# EAGLE board LandingGearSchematic_5 (EAGLE 9.5.1)
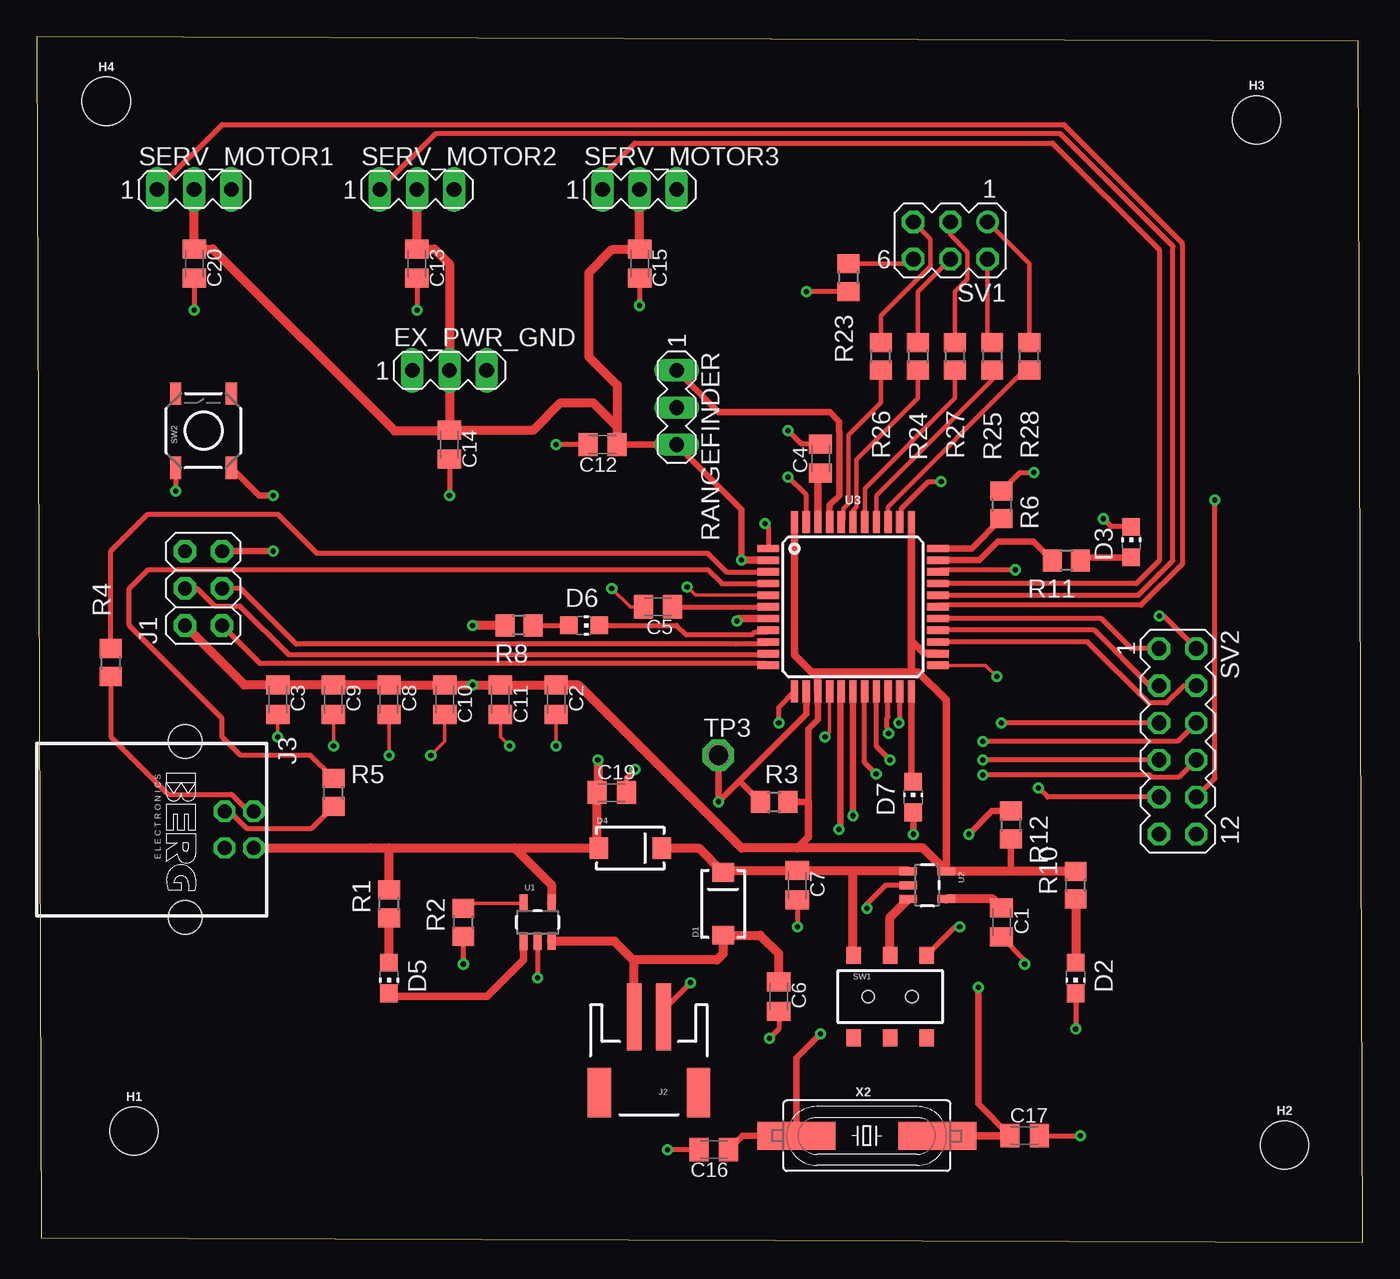
[diagram p0: board, top side]
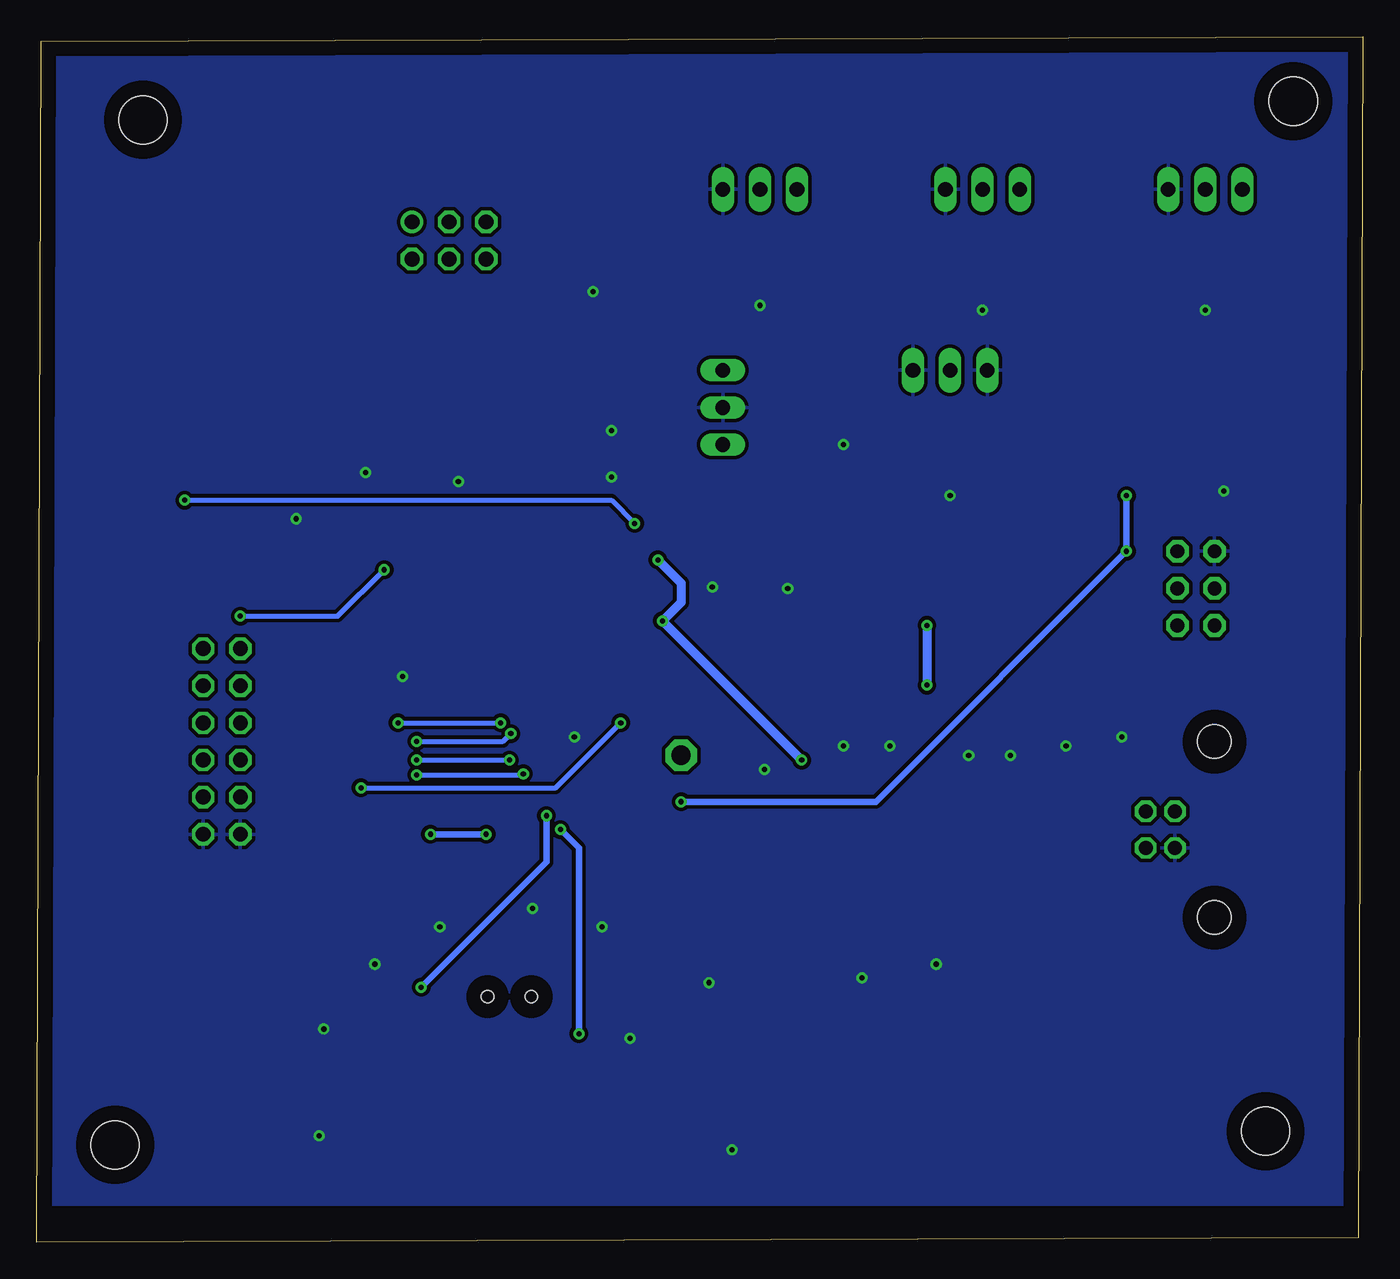
[diagram p1: board, bottom side, seen from below]

Size 90.78 x 82.54 mm. Coordinates in mm from the lower left corner, seen from the top.
Outline: 0.32,0.32 90.78,0 90.47,82.22 0,82.54 0.32,0.32
Copper layers (1*16): Top 0.035mm / dielectric 1.5mm / Bottom 0.035mm
Design rules "default": minimum track width 6mil, minimum drill 0.35mm, track to track 6mil, track to pad 6mil, pad to pad 6mil, via to via 6mil, smd to smd 6mil, copper to edge 40mil, drill to drill 6mil, minimum pad ring 10mil, minimum via ring 8mil, stop-mask expansion 4mil, vias tented up to drill 0mil, thermal gap 10mil
Net classes: 0 default: width 0.254 mm, clearance 0.254 mm; 1 power: width 0.61 mm, drill 0.61 mm, clearance 0.254 mm

## Footprints (pad centres in the part's own frame; a part is rotated, then mirrored left to right if it is on the bottom)
C0805K = smd 1.3 x 1.6: 1 -1,0; 2 1,0
SMA-DIODE = smd 1.27 x 1.47: A -2.15,0; C 2.15,0
CHIP-LED0805 = smd 1.2 x 1.2: A 0,-1.05; C 0,1.05
MA03-1 = drill 1.016 long: 1 -2.54,0; 2 0,0; 3 2.54,0
STAND-OFF = hole 3.302: 0,0
2X03 = drill 0.95 pad 1.55 octagon: 1 -2.54,-1.27; 2 -2.54,1.27; 3 0,-1.27; 4 0,1.27; 5 2.54,-1.27; 6 2.54,1.27
JST-2-SMD = smd 1 x 4.6: 1 -1,-3.7; 2 1,-3.7 | smd 1.6 x 3.4: NC1 -3.4,1.5; NC2 3.4,1.5
PN61729 = drill 0.95 octagon: 1 1.25,4.71; 2 -1.25,4.71; 3 -1.25,2.71; 4 1.25,2.71 | hole 2.3: -6.02,0; 6.02,0
R0805 = smd 1.3 x 1.5: 1 -0.95,0; 2 0.95,0
MA03-2 = drill 1.016: 1 -2.54,-1.27 | drill 1.016 octagon: 2 -2.54,1.27; 3 0,-1.27; 4 0,1.27; 5 2.54,-1.27; 6 2.54,1.27
MA06-2 = drill 1.016 octagon: 1 -6.35,-1.27; 2 -6.35,1.27; 3 -3.81,-1.27; 4 -3.81,1.27; 5 -1.27,-1.27; 6 -1.27,1.27; 7 1.27,-1.27; 8 1.27,1.27; 9 3.81,-1.27; 10 3.81,1.27; 11 6.35,-1.27; 12 6.35,1.27
AYZ0202 = smd 1 x 1.15: 1 -2.5,2.825; 2 0,2.825; 3 2.5,2.825; 4 -2.5,-2.825; 5 0,-2.825; 6 2.5,-2.825 | hole 0.85: 1.5,0; -1.5,0
TACTILE_SWITCH_SMD = smd 1.524 x 0.762: 1 -2.54,1.905; 2 2.54,1.905; 3 -2.54,-1.905; 4 2.54,-1.905
P1-13 = drill 1.321 pad 2.159 octagon: TP 0,0
SOT23-5 = smd 0.55 x 1.2: 1 -0.95,-1.3; 2 0,-1.3; 3 0.95,-1.3; 4 0.95,1.3; 5 -0.95,1.3
TQFP44 = smd 1.5 x 0.5: 1 -5.8,4; 2 -5.8,3.2; 3 -5.8,2.4; 4 -5.8,1.6; 5 -5.8,0.8; 6 -5.8,0; 7 -5.8,-0.8; 8 -5.8,-1.6; 9 -5.8,-2.4; 10 -5.8,-3.2; 11 -5.8,-4; 23 5.8,-4; 24 5.8,-3.2; 25 5.8,-2.4; 26 5.8,-1.6; 27 5.8,-0.8; 28 5.8,0; 29 5.8,0.8; 30 5.8,1.6; 31 5.8,2.4; 32 5.8,3.2; 33 5.8,4 | smd 0.5 x 1.5: 12 -4,-5.8; 13 -3.2,-5.8; 14 -2.4,-5.8; 15 -1.6,-5.8; 16 -0.8,-5.8; 17 0,-5.8; 18 0.8,-5.8; 19 1.6,-5.8; 20 2.4,-5.8; 21 3.2,-5.8; 22 4,-5.8; 34 4,5.8; 35 3.2,5.8; 36 2.4,5.8; 37 1.6,5.8; 38 0.8,5.8; 39 0,5.8; 40 -0.8,5.8; 41 -1.6,5.8; 42 -2.4,5.8; 43 -3.2,5.8; 44 -4,5.8
HC49UP = smd 5.334 x 1.93: 1 -4.826,0; 2 4.826,0

## Placement (x,y rotation side)
C1  470p  [C0805K]  66.04,21.91 270 top
C2  100n  [C0805K]  35.56,37.15 270 top
C3  100n  [C0805K]  16.51,37.15 270 top
C4  100n  [C0805K]  53.66,53.66 90 top
C5  1u  [C0805K]  42.55,43.5 180 top
C6  4.7u  [C0805K]  50.8,16.83 270 top
C7  4.7u  [C0805K]  52.07,24.45 270 top
C8  4.7u  [C0805K]  24.13,37.15 270 top
C9  100n  [C0805K]  20.32,37.15 270 top
C10  100n  [C0805K]  27.94,37.15 270 top
C11  100n  [C0805K]  31.75,37.15 270 top
C12  0.1u  [C0805K]  38.73,54.61 180 top
C13  0.1u  [C0805K]  26.04,66.99 270 top
C14  0.1u  [C0805K]  28.26,54.61 270 top
C15  0.1u  [C0805K]  41.27,66.99 270 top
C16  30p  [C0805K]  46.35,6.35 180 top
C17  30p  [C0805K]  67.63,7.3 0 top
C19  4.7u  [C0805K]  39.37,30.8 0 top
C20  0.1u  [C0805K]  10.79,66.99 270 top
D1  B340A  [SMA-DIODE]  46.99,23.18 90 top
D2  GREEN  [CHIP-LED0805]  71.12,18.1 180 top
D3  GREEN  [CHIP-LED0805]  74.93,47.94 0 top
D4  B340A  [SMA-DIODE]  40.64,26.99 0 top
D5  GREEN  [CHIP-LED0805]  24.13,18.1 180 top
D6  GREEN  [CHIP-LED0805]  37.47,42.23 270 top
D7  GREEN  [CHIP-LED0805]  60.01,30.48 0 top
EX_PWR_GND  [MA03-1]  28.26,59.69 0 top
H1  STAND-OFF  [STAND-OFF]  6.67,7.62 0 top
H2  STAND-OFF  [STAND-OFF]  85.41,6.67 0 top
H3  STAND-OFF  [STAND-OFF]  83.5,76.84 0 top
H4  STAND-OFF  [STAND-OFF]  4.76,78.1 0 top
J1  3x2 M  [2X03]  11.43,44.77 90 top
J2  S2B-PH-SM4-TB(LF)(SN)  [JST-2-SMD]  41.91,11.75 180 top
J3  [PN61729]  10.16,28.26 270 top
R1  1K  [R0805]  24.13,23.18 90 top
R2  10K  [R0805]  29.21,21.91 90 top
R3  10K  [R0805]  50.48,30.16 0 top
R4  22  [R0805]  5.08,39.69 90 top
R5  22  [R0805]  20.32,30.8 90 top
R6  10K  [R0805]  66.04,50.48 270 top
R8  1K  [R0805]  33.02,42.23 180 top
R10  1K  [R0805]  71.12,24.45 90 top
R11  1K  [R0805]  70.48,46.67 180 top
R12  1K  [R0805]  66.67,28.58 270 top
R23  0  [R0805]  55.56,66.04 270 top
R24  0  [R0805]  60.33,60.64 270 top
R25  0  [R0805]  65.41,60.64 270 top
R26  0  [R0805]  57.78,60.64 90 top
R27  0  [R0805]  62.87,60.64 90 top
R28  0  [R0805]  67.94,60.64 90 top
RANGEFINDER  [MA03-1]  43.81,57.15 270 top
SERV_MOTOR1  [MA03-1]  10.79,72.07 0 top
SERV_MOTOR2  [MA03-1]  26.04,72.07 0 top
SERV_MOTOR3  [MA03-1]  41.27,72.07 0 top
SV1  [MA03-2]  62.55,68.58 180 top
SV2  [MA06-2]  78.11,34.29 270 top
SW1  AYZ0202AGRLC  [AYZ0202]  58.42,16.83 0 top
SW2  !RESET  [TACTILE_SWITCH_SMD]  11.43,55.56 90 top
TP3  TPPAD1-13  [P1-13]  46.67,33.34 0 top
U1  MCP73831  [SOT23-5]  34.29,21.91 0 top
U2  MIC5219  [SOT23-5]  60.96,24.45 270 top
U3  ATMEGA32U4-AUR  [TQFP44]  55.88,43.5 0 top
X2  16 MHz  [HC49UP]  56.83,7.3 0 top

## Library data of the parts
C1 = rcl; DESC: CAP CER 470PF 50V X7R 0805; MFR: Samsung; MPN: CL21B471KBANNNC; SPICEPREFIX: C
C2-C4 C9-C11 = rcl; DESC: CAP CER 0.1UF 50V X7R 0805; MFR: Samsung; MPN: CL21B104KBCNNNC; SPICEPREFIX: C
C5 C12-C15 C20 = rcl; DESC: CAP CER 1UF 16V X7R 0805; MFR: Samsung; MPN: CL21B105KOFNNNG; SPICEPREFIX: C
C6-C8 C19 = rcl; DESC: CAP CER 4.7UF 16V X5R 0805; MFR: Samsung; MPN: CL21A475KOFNNNE; SPICEPREFIX: C
C16 = rcl; DESC: CAP CER 30PF 50V C0G/NP0 0805; MFR: Samsung; MPN: CL21C300JBANNNC; SPICEPREFIX: C
C17 = rcl; DESC: CAP CER 30PF 50V C0G/NP0 0805; MFR: Samsung; MPN: CL21C180JBANNNC; SPICEPREFIX: C
D1 D4 = SparkFun-DiscreteSemi; DESC: DIODE SCHOTTKY 40V 2A SMA; MFR: Diodes Inc; MPN: B340AE-13
D2 D3 D5-D7 = led; DESC: LED GREEN CLEAR 0805 SMD; MFR: Würth Elektronik; MPN: 150080GS75000
EX_PWR_GND RANGEFINDER SERV_MOTOR1-SERV_MOTOR3 SV1 SV2 = con-lstb; OC_FARNELL: unknown; OC_NEWARK: unknown
H1-H4 = SparkFun-Hardware
J1 = SmartPrj; DESC: CONN HEADER VERT 6POS 2ROW 2.54MM; MFR: Harwin; MPN: M20-9980345
J2 = SparkFun-Connectors; DESC: CONN HEADER SMD R/A 2POS 2MM; MFR: JST; MPN: S2B-PH-SM4-TB(LF)(SN)
J3 = con-berg; OC_FARNELL: unknown; OC_NEWARK: unknown
R1 R8 R10-R12 R23-R28 = rcl; DESC: RES SMD 1K OHM 1% 1/8W 0805; MFR: Yageo; MPN: RC0805FR-071KL; SPICEPREFIX: R
R2 R3 R6 = rcl; DESC: RES SMD 10K OHM 1% 1/8W 0805; MFR: Yageo; MPN: RC0805FR-0710KL; SPICEPREFIX: R
R4 R5 = rcl; DESC: RES SMD 22 OHM 1% 1/8W 0805; MFR: Yageo; MPN: RC0805FR-0722RL; SPICEPREFIX: R
SW1 = SparkFun-Electromechanical; DESC: SWITCH SLIDE DPDT 100MA 12V; MFR: C&K; MPN: AYZ0202AGRLC
SW2 = SparkFun-Electromechanical; DESC: SWITCH TACTILE SPST-NO 0.05A 12V; MFR: C&K; MPN: RS-187R05A2-DS MT RT
TP3 = testpad
U1 = SparkFun-PowerIC; DESC: IC CONTROLLR LI-ION 4.2V SOT23-5; MFR: Microchip; MPN: MCP73831T-2ACI/OT; PROD_ID: IC-09995
U2 = SparkFun-PowerIC; DESC: IC REG LINEAR 3.3V 500MA SOT23-5; MFR: Microchip; MPN: MIC5219-3.3YM5-TR
U3 = SparkFun-IC-Microcontroller; DESC: IC MCU 8BIT 32KB FLASH 44TQFP; MFR: Microchip; MPN: ATMEGA32U4-AUR; PROD_ID: IC-10828
X2 = SparkFun-Clocks; DESC: CRYSTAL 16.000 MHZ 18PF SMD; MFR: ECS; MPN: ECS-160-18-5PX-TR

## Nets
3.3V: C2.1 C3.1 C8.1 C9.1 C10.1 C11.1 J1.2 R3.2 R8.2 R10.2 R12.2 U2.5 U3.14 U3.24 U3.34 U3.44
!RESET: J1.5 R3.1 SW2.3 TP3.TP U3.13
AREF: C4.1 U3.42
D13#/USER_LED: R11.2 U3.32
D14/MISO: J1.1 U3.11
D15/SCK: J1.3 U3.9
D16/MOSI: J1.4 U3.10
D17/RX-LED: D6.C U3.8
D+: R5.2 U3.4
D-: R4.2 U3.3
GND: C1.2 C2.2 C3.2 C4.2 C5.2 C6.2 C7.2 C8.2 C9.2 C10.2 C11.2 C12.2 C13.2 C14.2 C15.2 C16.2 C17.2 C19.2 C20.2 D2.C D3.C EX_PWR_GND.1 EX_PWR_GND.3 J1.6 J2.1 J3.4 R2.1 R6.1 R23.2 RANGEFINDER.2 SERV_MOTOR1.3 SERV_MOTOR2.3 SERV_MOTOR3.3 SV2.11 SV2.12 SW1.3 SW2.1 U1.2 U2.2 U3.5 U3.15 U3.23 U3.35 U3.43
MCPPROG: R2.2 U1.5
MIC-BP: C1.1 U2.4
MIC-EN: SW1.2 U2.3
N$3: D5.A R1.1
N$4: D5.C U1.1
N$7: D2.A R10.1
N$13: D3.A R11.1
N$15: D6.A R8.1
N$16: D7.A R12.1
N$19: J3.2 R4.1
N$20: J3.3 R5.1
N$22: R23.1 SV1.6
NC_A0: R28.1 U3.36
NC_A0_R: R28.2 SV1.1
NC_A1: R25.2 U3.37
NC_A1_R: R25.1 SV1.2
NC_A2: R27.1 U3.38
NC_A2_R: R27.2 SV1.3
NC_A3: R24.2 U3.39
NC_A3_R: R24.1 SV1.4
NC_A4: R26.1 U3.40
NC_A4_R: R26.2 SV1.5
NC_D0: SV2.6 U3.20
NC_D1: SV2.5 U3.21
NC_D2: SV2.7 U3.19
NC_D3: SV2.8 U3.18
NC_D4: SV2.4 U3.25
NC_D5: SV2.2 U3.31
NC_D6: SV2.1 U3.27
NC_D7: SV2.10 U3.1
NC_D11: SV2.9 U3.12
NC_D12: SV2.3 U3.26
PE2/!HWB: R6.2 U3.33
PWRIN: C7.1 D1.C D4.C SW1.1 U2.1
RANGE_OUT: RANGEFINDER.1 U3.41
SERV1: SERV_MOTOR1.1 U3.28
SERV2: SERV_MOTOR2.1 U3.29
SERV3: SERV_MOTOR3.1 U3.30
TX_LED: D7.C U3.22
UCAP: C5.1 U3.6
V_BATT: C6.1 D1.A J2.2 U1.3
VBUS: C12.1 C13.1 C14.1 C15.1 C19.1 C20.1 D4.A EX_PWR_GND.2 J3.1 R1.2 RANGEFINDER.3 SERV_MOTOR1.2 SERV_MOTOR2.2 SERV_MOTOR3.2 U1.4 U3.2 U3.7
XTAL1: C17.1 U3.17 X2.2
XTAL2: C16.1 U3.16 X2.1

## Tracks (layer width: path | path; a pad name or v marks a point on that pad's centre or on a via)
3.3V  (via drill 0.35)
  Top 0.457: U3.14 53.48,35.79 52.84,35.16 52.84,30.16 R3.2 | R12.2 66.67,25.4
  Top 0.508: U3.14 53.44,37.74 53.44,38.66 53.04,39.05 | U3.44 51.88,40.22 53.04,39.05 | U3.24 61.64,40.34 60.72,40.34 59.88,41.18 | U3.34 59.88,41.18 | 53.04,39.05 60.01,39.05 | 60.01,39.05 60.33,39.05 62.26,37.12 U2.5 | 59.88,41.18 59.88,39.18 60.01,39.05 | 52.84,30.16 52.84,27.76 52.07,26.99
  Top 0.61: J1.2 14.24,38.15 C3.1 C9.1 C8.1 C10.1 v29.84,38.15 C11.1 C2.1 37.1,38.15 48.26,26.99 52.07,26.99 60.67,26.99 U2.5 66.67,25.4 R10.2 | R8.2 v29.84,42.23
  Bottom 0.61: v29.84,42.23 v29.84,38.15
!RESET  (via drill 0.35)
  Top 0.457: J1.5 v16.19,47.31 | 48.1,31.59 v46.67,30.16 TP3.TP | U3.13 52.68,36.17 48.1,31.59 | R3.1 48.1,31.59 | SW2.3 15.24,51.12 v16.19,51.12
  Bottom 0.457: v46.67,30.16 33.34,30.16 v16.19,47.31 v16.19,51.12
AREF
  Top 0.508: U3.42 53.48,52.48 C4.1
D13#/USER_LED
  Top 0.457: U3.32 64.54,46.7 65.81,47.97 68.24,47.97 R11.2
D14/MISO
  Top 0.356: U3.11 49.96,39.62 15.31,39.62 J1.1
D15/SCK
  Top 0.356: J1.3 13.97,44.77 17.78,40.96 47.86,40.96 47.88,40.98 49.96,40.98 U3.9
D16/MOSI
  Top 0.356: J1.4 10.99,44.77 12.2,43.56 13.91,43.56 17.24,40.23 50.01,40.23 U3.10
D17/RX-LED
  Top 0.356: D6.C 43.81,42.23 44.45,41.59 48.96,41.59 49.15,41.78 49.96,41.78 U3.8
D+
  Top 0.356: R5.2 18.73,33.34 13.97,33.34 12.7,34.61 12.7,35.88 6.35,42.23 6.35,44.77 7.62,46.04 45.97,46.04 46.91,45.1 U3.4
D-
  Top 0.356: R4.2 5.08,47.31 7.62,49.85 16.51,49.85 19.19,47.17 45.95,47.17 47.22,45.9 U3.3
GND  (via drill 0.35)
  Top 0.254: U3.5 45.09,44.3 v44.53,44.85 | C5.2 40.64,43.5 v39.37,44.77 | U3.15 54.28,34.91 v53.98,34.61 | U3.23 64.96,39.5 v65.72,38.73 | C2.2 v35.56,33.97 | v32.38,33.97 31.75,34.61 C11.2 | C10.2 27.94,34.29 v26.99,33.34 | C8.2 v24.13,33.34 | C9.2 v20.32,33.97 | C3.2 v16.51,34.61
  Top 0.356: C20.2 v10.79,63.82 | C13.2 v26.04,63.82 | C15.2 v41.27,64.13 | R23.2 v52.7,65.09 | D3.C 73.56,48.99 v73.03,49.53 | SW2.1 v9.53,51.43 | C17.2 v71.44,7.3 | D2.C v71.12,14.61 | C1.2 67.63,19.32 v67.63,19.05 | SW1.3 62.86,21.59 v63.18,21.59 | U2.2 58.1,24.45 56.83,23.18 v56.83,22.86 | C7.2 v52.07,21.59 | C16.2 v43.18,6.35 | C6.2 50.8,14.61 v50.16,13.97 | J2.1 42.91,15.92 v44.77,17.78 | R2.1 v29.21,19.05 | U1.2 v34.29,18.1 | C19.2 40.37,31.8 v40.96,32.38 | R6.1 67.31,52.71 v68.26,52.71 | U3.35 59.19,49.41 59.19,50.22 61.04,52.07 v61.91,52.07 | U3.43 52.68,51.14 v51.44,52.39 | C4.2 52.34,54.66 v51.44,55.56 | C12.2 v35.56,54.61 | C14.2 v28.26,51.12
  pour Bottom: 0.64,2.54 90.17,2.54 90.17,81.6 0.64,81.6
MCPPROG
  Top 0.254: R2.2 29.55,23.19 29.53,23.21 U1.5
MIC-BP
  Top 0.61: C1.1 65.45,23.5 U2.4
MIC-EN
  Top 0.61: SW1.2 58.42,22.26 U2.3
N$3
  Top 0.61: D5.A R1.1
N$4
  Top 0.254: D5.C 24.35,16.83
  Top 0.508: U1.1 33.34,19.34 30.83,16.83 24.35,16.83
N$7
  Top 0.61: R10.1 D2.A
N$13
  Top 0.457: R11.1 71.66,46.89 D3.A
N$15
  Top 0.356: R8.1 D6.A
N$16  (via drill 0.35)
  Top 0.457: R12.1 65.4,29.52 v63.82,27.94 | v60.01,27.94 D7.A
  Bottom 0.457: v63.82,27.94 v60.01,27.94
N$19
  Top 0.356: R4.1 5.08,34.61 9.02,30.67 13.35,30.67 14.51,29.51 J3.2
N$20
  Top 0.356: J3.3 13.23,29.51 14.39,28.35 18.82,28.35 R5.1
N$22
  Top 0.305: SV1.6 59.69,66.99 R23.1
NC_A0
  Top 0.305: R28.1 67.63,59.69 58.28,50.35 U3.36
NC_A0_R
  Top 0.305: SV1.1 67.94,66.99 R28.2
NC_A1
  Top 0.305: U3.37 57.48,51.13 65.41,59.06 R25.2
NC_A1_R
  Top 0.305: SV1.2 65.09,61.91 R25.1
NC_A2
  Top 0.305: U3.38 56.68,50.09 56.69,50.1 56.69,51.62 62.87,57.79 R27.1
NC_A2_R
  Top 0.305: SV1.3 62.55,68.96 63.72,67.79 63.72,65.94 62.87,65.09 R27.2
NC_A3
  Top 0.305: U3.39 55.88,50.08 56.13,50.34 56.13,53.6 60.33,57.79 R24.2
NC_A3_R
  Top 0.305: R24.1 60.33,65.09 SV1.4
NC_A4
  Top 0.305: R26.1 57.78,57.47 55.58,55.26 55.58,50.57 55.22,50.22 55.22,49.44 U3.40
NC_A4_R
  Top 0.305: SV1.5 61.18,68.68 61.18,66.83 57.78,63.44 R26.2
NC_D0  (via drill 0.35)
  Top 0.356: SV2.6 78.11,34.29 v64.77,34.29 | v58.32,34.83 58.32,35.11 58.21,35.22 58.21,35.9 58.28,35.97 U3.20
  Bottom 0.356: v64.77,34.29 58.86,34.29 v58.32,34.83
NC_D1  (via drill 0.35)
  Top 0.356: SV2.5 v66.04,35.56 | v59.02,35.56 59.08,35.62 U3.21
  Bottom 0.356: v66.04,35.56 v59.02,35.56
NC_D2  (via drill 0.35)
  Top 0.356: SV2.7 v64.77,33.02 | v58.42,33.02 57.48,33.96 U3.19
  Bottom 0.356: v64.77,33.02 v58.42,33.02
NC_D3  (via drill 0.35)
  Top 0.356: v64.77,32.01 76.16,32.01 76.34,31.83 78.18,31.83 SV2.8 | v57.47,32.07 56.68,32.86 U3.18
  Bottom 0.356: v64.77,32.01 57.52,32.01 v57.47,32.07
NC_D4
  Top 0.356: SV2.4 78.52,38.1 77.33,36.91 76.12,36.91 71.93,41.1 U3.25
NC_D5  (via drill 0.35)
  Top 0.356: SV2.2 77.15,42.86 v76.83,42.86 | v66.99,46.04 66.97,46.02 61.8,46.02 U3.31
  Bottom 0.356: v76.83,42.86 70.17,42.86 v66.99,46.04
NC_D6
  Top 0.356: SV2.1 74.93,40.64 72.87,42.7 U3.27
NC_D7  (via drill 0.35)
  Top 0.356: SV2.10 80.64,31.75 v80.64,50.8 | v49.85,49.21 50.08,48.98 U3.1
  Bottom 0.356: v80.64,50.8 51.44,50.8 v49.85,49.21
NC_D11  (via drill 0.35)
  Top 0.356: SV2.9 69.22,30.48 v68.58,31.12 | v50.8,35.56 50.8,36.62 U3.12
  Bottom 0.356: v68.58,31.12 55.24,31.12 v50.8,35.56
NC_D12
  Top 0.356: SV2.3 76.2,38.1 72.39,41.91 61.69,41.91 U3.26
PE2/!HWB
  Top 0.457: U3.33 64,47.5 R6.2
PWRIN
  Top 0.254: D1.C 47.11,25.45
  Top 0.61: D4.C 45.33,26.99 D1.C | 47.11,25.45 C7.1 55.88,25.45 | 55.88,25.45 59.61,25.45 U2.1 | SW1.1 55.88,19.69 55.88,25.45
RANGE_OUT
  Top 0.457: RANGEFINDER.1 46.67,56.83 54.29,56.83 54.93,56.2 54.93,55.52 54.94,55.51 54.94,51.13 54.28,50.47 U3.41
SERV1
  Top 0.356: SERV_MOTOR1.1 12.7,76.52 70.32,76.52 78.4,68.44 78.4,68.29 78.42,68.26 78.42,46.45 75.59,43.62 61.8,43.62 U3.28
SERV2
  Top 0.356: U3.29 75.41,44.3 77.79,46.67 77.79,68.18 70.09,75.88 27.3,75.88 SERV_MOTOR2.1
SERV3
  Top 0.356: SERV_MOTOR3.1 38.73,73.02 40.96,75.25 69.53,75.25 76.83,67.94 76.83,46.67 75.26,45.1 U3.30
TX_LED
  Top 0.457: D7.C 59.88,31.66 U3.22
UCAP
  Top 0.356: C5.1 U3.6
V_BATT
  Top 0.61: J2.2 40.91,19.26 40.83,19.34 | 40.83,19.34 39.56,20.61 U1.3 | C6.1 50.8,19.76 49.53,21.03 D1.A 46.99,19.76 46.57,19.34 40.83,19.34
VBUS  (via drill 0.35)
  Top 0.254: 38.47,27.01 D4.A 38.37,27.11
  Top 0.457: C12.1 RANGEFINDER.3 48.26,50.16 v48.26,46.71
  Top 0.508: U3.7 48.09,42.7 v47.94,42.55 | v48.26,46.71 U3.2
  Top 0.61: J3.1 22.84,27.01 24.13,27.01 | 24.13,27.01 32.71,27.01 | U1.4 35.24,24.48 32.71,27.01 | 32.71,27.01 38.47,27.01 | 38.37,27.11 C19.1 38.42,30.84 v38.42,33.02 | C14.1 34.02,55.61 35.88,57.47 38.1,57.47 39.73,55.83 C12.1 39.73,58.69 37.78,60.64 37.78,66.36 39.37,67.94 41.23,67.94 C15.1 SERV_MOTOR3.2 | C14.1 EX_PWR_GND.2 28.26,66.96 27.23,67.99 C13.1 SERV_MOTOR2.2 | SERV_MOTOR1.2 C20.1 12.06,67.99 24.5,55.56 28.21,55.56 C14.1 | R1.2 24.13,27.01
  Bottom 0.61: v38.42,33.02 v47.94,42.55 46.67,43.82 46.67,45.12 v48.26,46.71
XTAL1  (via drill 0.35)
  Top 0.457: C17.1 64.45,9.48 v64.45,17.46 | v55.88,29.21 U3.17
  Top 0.508: C17.1 X2.2
  Bottom 0.457: v64.45,17.46 55.88,26.04 v55.88,29.21
XTAL2  (via drill 0.35)
  Top 0.457: C16.1 48.31,7.3 X2.1 52.01,12.64 v53.66,14.29 | v54.93,28.26 55.01,28.34 55.01,37.63 U3.16
  Bottom 0.457: v53.66,14.29 53.66,26.99 v54.93,28.26